# Altium PCB 04-12307_Drone_ESC.PcbDoc (part 2 of 5)
Units mm, origin at the board's own origin, x right, y up, seen from the top; angles counter-clockwise.
Board outline 55 x 33 mm, 4 copper layers (LAYER 1 (Top), LAYER 2, LAYER 3, LAYER 4 (Bottom)), stack 1.504 mm thick; 174 components, 90 nets, 407 pads, 193 vias.
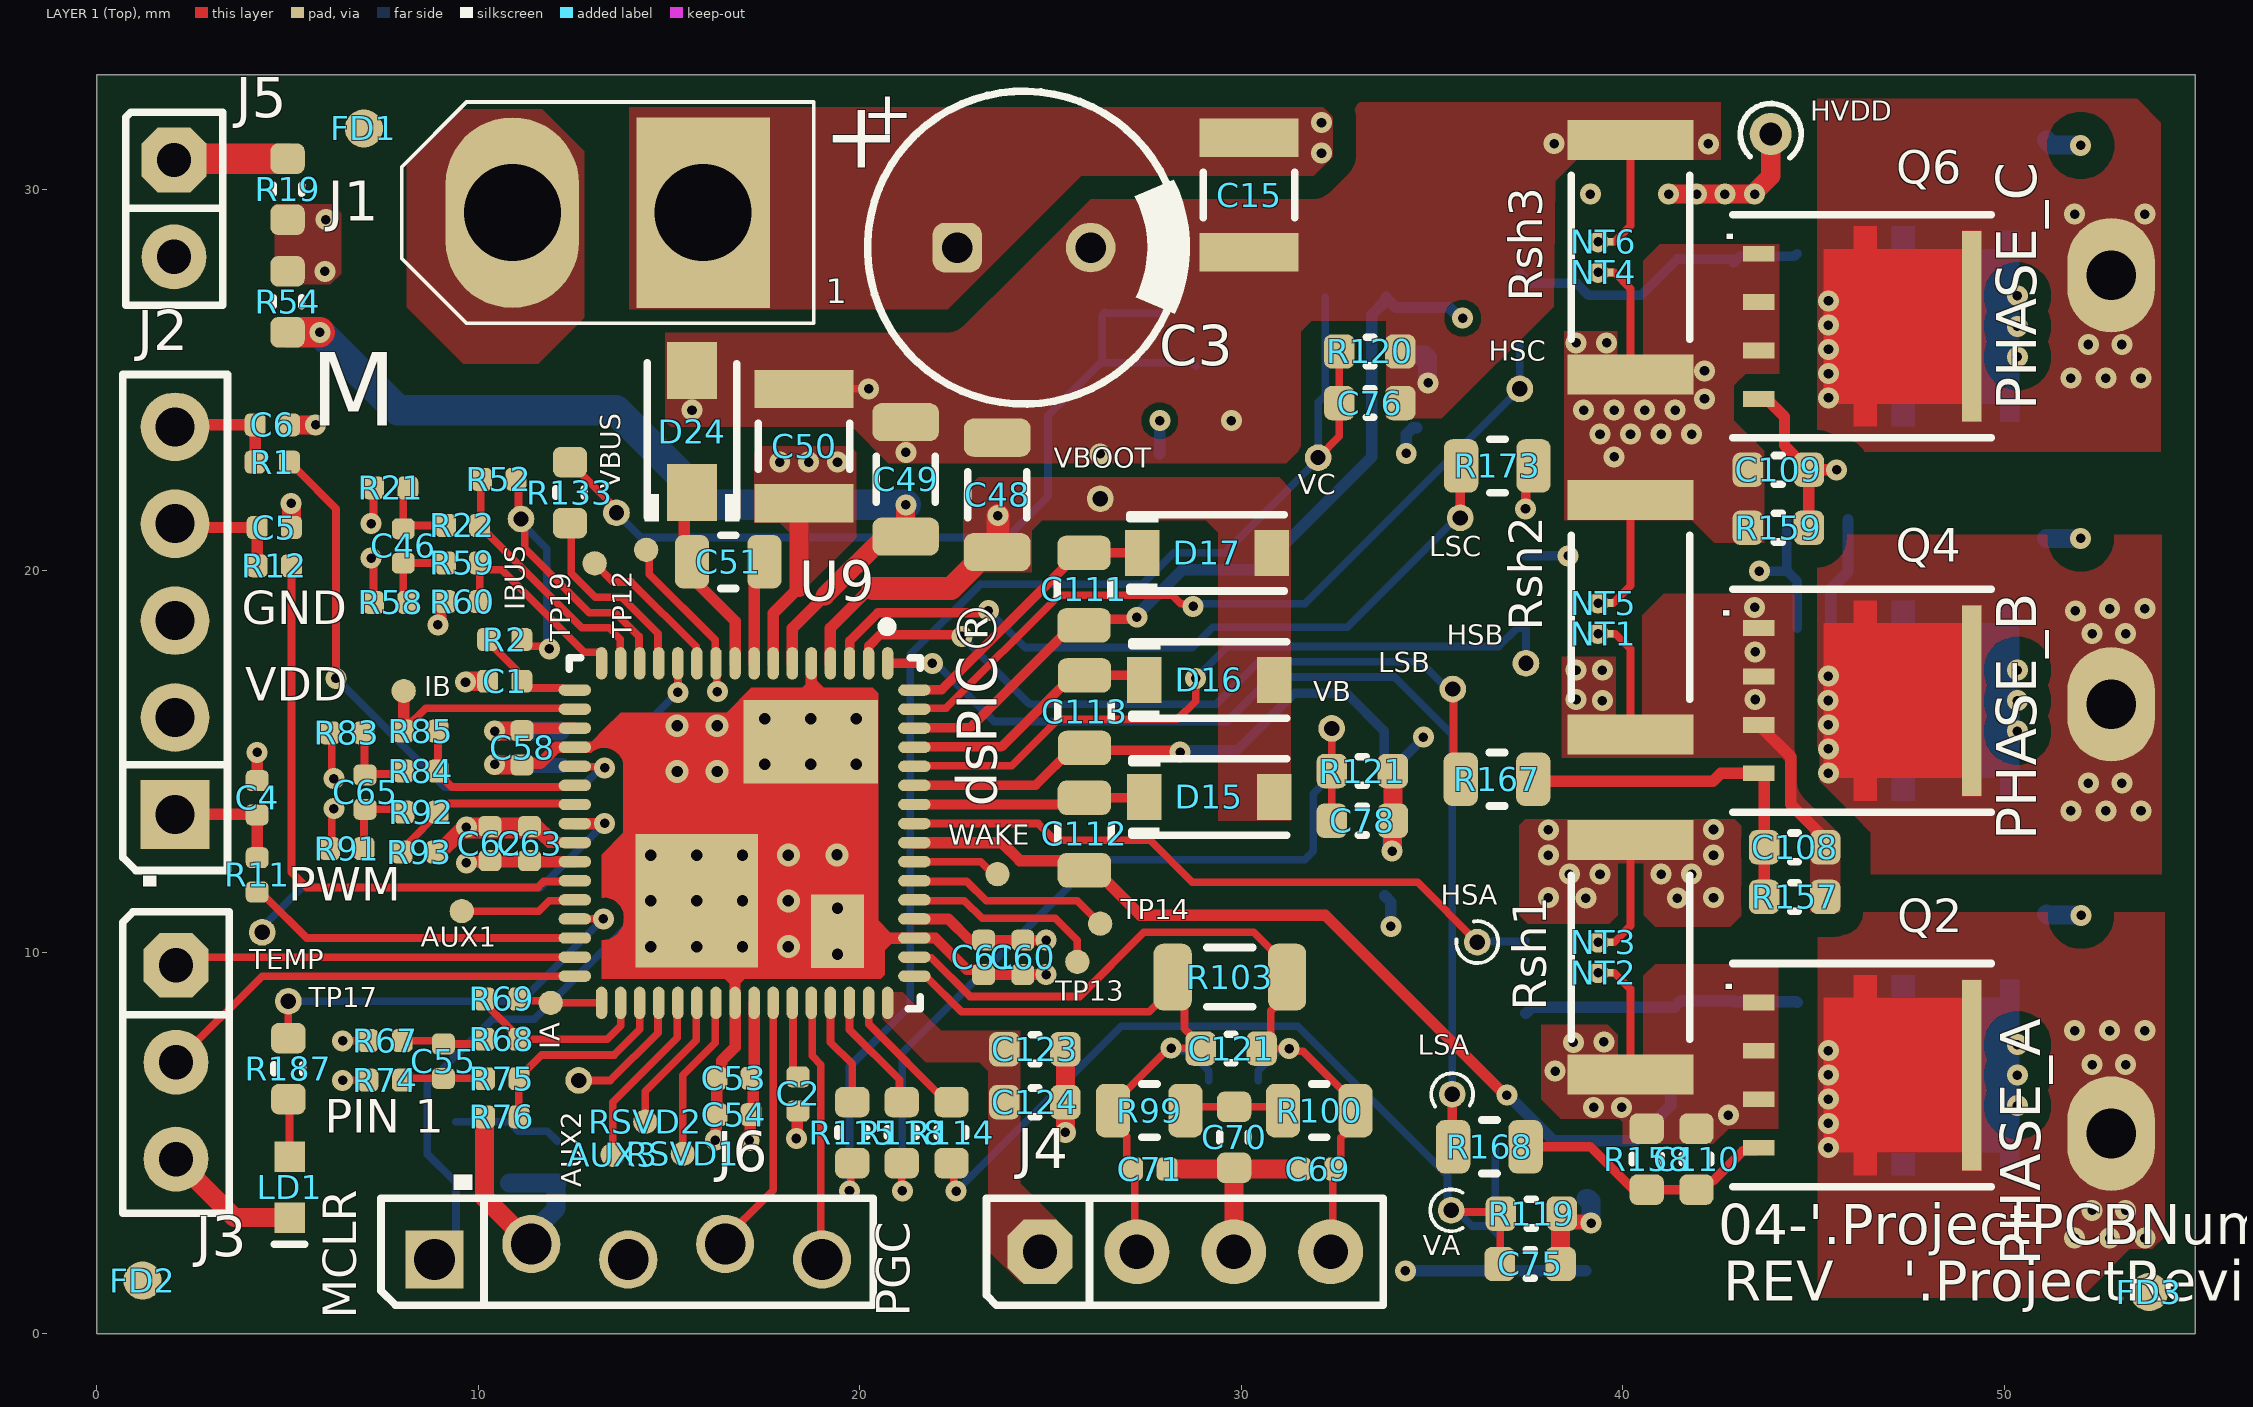
[diagram p0: LAYER 1 (Top) view]

## Part data (continued)
C85: library part CAP0011, "Capacitor", Manufacturer 1="Taiyo Yuden", Manufacturer 2="Wurth Electronics Inc", Manufacturer 3=Samsung, Manufacturer 4=AVX, Manufacturer 5=Murata, Manufacturer 6=Yageo, Manufacturer 8="Murata Electronics North America", Manufacturer Part Number 1=EMK107B7104KA-T, Manufacturer Part Number 2=885012206046, Manufacturer Part Number 3=CL10B104KO8NNNC, Manufacturer Part Number 4=0603YC104KAT2A, Manufacturer Part Number 5=GRM188R71C104KA01D, Manufacturer Part Number 6=CC0603KRX7R7BB104, Manufacturer Part Number 8=GCM188R71C104KA37D, Operating Temperature="-55C to +125C", Package=0603, Supplier Part Number 1=587-1240-1-ND, Temperature Coeffcient=X7R, Tolerance=10%, Voltage=16V, Category=Capacitor, ComponentLink1Description="SVN Datasheet", ComponentLink1URL=https://chn-vm-apps.microchip.com/mchprepo/parts/Datasheets/nmc2.pdf, ComponentLink2Description="Local Datasheet", ComponentLink2URL=C:\ALTIUM_WORK\00001_MCHP-CDB\Datasheets\nmc2.pdf, ComponentLink3Description="Open Symbol", ComponentLink3URL="C:\ALTIUM_WORK\00001_MCHP-CDB\Library\LibraryRefs\Capacitor NP.SchLib", ComponentLink4Description="Open Footprint", ComponentLink4URL=C:\ALTIUM_WORK\00001_MCHP-CDB\Library\Footprints\CAP_C_0603.PcbLib, ComponentLink5Description="Open Footprint 2", ComponentLink6Description="Open Footprint 3", ComponentLink7Description="Open Footprint 4", Description_="CAP CER 0.1uF 16V 10% X7R SMD 0603", Dev Tools Status=Production, Manufacturer 7="Taiyo Yuden", Manufacturer Part Number 7=EMK107B7104KA-T, MCHP-ID=CAP0011, Owner="Cristian Papuc", Populated=YES, Quantity Override=1, Revision=3, Status="MCL Design", Supplier 1=Digi-Key, Supplier 2=Digi-Key, Supplier 3=Digi-Key, Supplier 4=Digi-Key, Supplier 5=Digi-Key, Supplier 6=Digi-Key, Supplier 7=Newark, Supplier 8=Digi-Key, Supplier Part Number 2=732-7965-1-ND, Supplier Part Number 3=1276-1005-1-ND, Supplier Part Number 4=478-1239-1-ND, Supplier Part Number 5=490-1532-1-ND, Supplier Part Number 6=311-1088-1-ND, Supplier Part Number 7=86H5248, Supplier Part Number 8=490-4774-1-ND, Symbol="Capacitor NP", Type=Ceramic
C105 C106 C107 C108 C109 C110: library part CAP0120, Manufacturer 1=KEMET, Manufacturer 2=Panasonic, Manufacturer 4="TDK Corporation", Manufacturer 5="Samsung Electro-Mechanics", Manufacturer 6=Yageo, Manufacturer Part Number 1=C0603C222K5RACTU, Manufacturer Part Number 2=ECJ-1VB1H222K, Manufacturer Part Number 3=ECU-V1H222KBV, Manufacturer Part Number 4=C1608X7R1H222K, Manufacturer Part Number 5=CL10B222KB8NNNC, Manufacturer Part Number 6=CC0603KRX7R9BB222, Operating Temperature="-55C to +125C", Package=0603, Supplier Part Number 1=399-1085-1-ND, Temperature Coefficient=X7R, Tolerance=10%, Voltage=50V, Category=Capacitor, ComponentLink1Description="SVN Datasheet", ComponentLink1URL=https://chn-vm-apps.microchip.com/mchprepo/parts/Datasheets/ECJ__General_.pdf, ComponentLink2Description="Local Datasheet", ComponentLink2URL=C:\ALTIUM_WORK\00001_MCHP-CDB\Datasheets\ECJ__General_.pdf, ComponentLink3Description="Open Symbol", ComponentLink3URL="C:\ALTIUM_WORK\00001_MCHP-CDB\Library\LibraryRefs\Capacitor NP.SchLib", ComponentLink4Description="Open Footprint", ComponentLink4URL=C:\ALTIUM_WORK\00001_MCHP-CDB\Library\Footprints\CAP_C_0603.PcbLib, ComponentLink5Description="Open Footprint 2", ComponentLink6Description="Open Footprint 3", ComponentLink7Description="Open Footprint 4", Description_="CAP CER 2200pF 50V 10% X7R SMD 0603", Dev Tools Status=Production, Manufacturer 3=Panasonic, MCHP-ID=CAP0120, Populated=Yes, Quantity Override=1, Revision=4, Status="MCL Design", Supplier 1=Digi-Key, Supplier 2=Digi-Key, Supplier 3=Digi-Key, Supplier 4=Digi-Key, Supplier 5="Samsung Electro-Mechanics", Supplier 6=Yageo, Supplier Part Number 2=PCC1776TR-ND, Supplier Part Number 3=PCC222BVTR-ND, Supplier Part Number 4=445-1309-1-ND, Supplier Part Number 5=CL10B222KB8NNNC, Supplier Part Number 6=CC0603KRX7R9BB222, Symbol="Capacitor NP", Type=Ceramic
C111 C112 C113: library part CAP0526, "Capacitor", Manufacturer 1=Murata, Manufacturer Part Number 1=GCM21BR71H224KA37L, Operating Temperature="-55C to +125C", Package=0805, Supplier Part Number 1=490-4970-1-ND, Temperature Coeffcient=X7R, Tolerance=10%, Voltage=50V, Category=Capacitor, ComponentLink1Description="SVN Datasheet", ComponentLink1URL=https://chn-vm-apps.microchip.com/mchprepo/parts/Datasheets/S0717E.pdf, ComponentLink2Description="Local Datasheet", ComponentLink2URL=C:\ALTIUM_WORK\00001_MCHP-CDB\Datasheets\S0717E.pdf, ComponentLink3Description="Open Symbol", ComponentLink3URL="C:\ALTIUM_WORK\00001_MCHP-CDB\Library\LibraryRefs\Capacitor NP.SchLib", ComponentLink4Description="Open Footprint", ComponentLink4URL=C:\ALTIUM_WORK\00001_MCHP-CDB\Library\Footprints\CAP_C_0805.PcbLib, ComponentLink5Description="Open Footprint 2", ComponentLink6Description="Open Footprint 3", ComponentLink7Description="Open Footprint 4", Description_="CAP CER 0.22uF 50V 10% X7R SMD 0805", Dev Tools Status=Production, MCHP-ID=CAP0526, Populated=Yes, Quantity Override=1, Revision=1, Status="MCL Design", Supplier 1=Digi-Key, Symbol="Capacitor NP", Type=Ceramic
C121: library part CAP1112, Manufacturer 1=KEMET, Manufacturer Part Number 1=C0603C101J1GACTU, Operating Temperature="-55C to +125C", Package=0603, Supplier Part Number 1=399-7821-1-ND, Temperature Coefficient="C0G, NP0", Tolerance=5%, Voltage=100V, Category=Capacitor, ComponentLink1Description="SVN Datasheet", ComponentLink1URL=https://chn-vm-apps.microchip.com/mchprepo/parts/Datasheets/KEM_C1003_C0G_SMD.pdf, ComponentLink2Description="Local Datasheet", ComponentLink2URL=C:\ALTIUM_WORK\00001_MCHP-CDB\Datasheets\KEM_C1003_C0G_SMD.pdf, ComponentLink3Description="Open Symbol", ComponentLink3URL="C:\ALTIUM_WORK\00001_MCHP-CDB\Library\LibraryRefs\Capacitor NP.SchLib", ComponentLink4Description="Open Footprint", ComponentLink4URL=C:\ALTIUM_WORK\00001_MCHP-CDB\Library\Footprints\CAP_C_0603.PcbLib, ComponentLink5Description="Open Footprint 2", ComponentLink6Description="Open Footprint 3", ComponentLink7Description="Open Footprint 4", Description_="CAP CER 100pF 100V 5% C0G SMD 0603", Dev Tools Status=Production, MCHP-ID=CAP1112, Owner="Mihai T(M91442)", Populated=Yes, Quantity Override=1, Revision=0, Status="MCL Design", Supplier 1=Digi-Key, Supplier 2=Farnell, Supplier Part Number 2=1414602, Symbol="Capacitor NP", Type=Ceramic
C123: library part CAP1060, Manufacturer 1=Yageo, Manufacturer 2="Samsung Electro-Mechanics", Manufacturer Part Number 1=CC0603KRX7R8BB105, Manufacturer Part Number 2=CL10B105KA8NNNC, Operating Temperature="-55C to +125C", Package=0603, Supplier Part Number 1=311-1802-1-ND, Temperature Coefficient=X7R, Tolerance=10%, Voltage=25V, Category=Capacitor, ComponentLink1Description="SVN Datasheet", ComponentLink2Description="Local Datasheet", ComponentLink3Description="Open Symbol", ComponentLink3URL="C:\ALTIUM_WORK\00001_MCHP-CDB\Library\LibraryRefs\Capacitor NP.SchLib", ComponentLink4Description="Open Footprint", ComponentLink4URL=C:\ALTIUM_WORK\00001_MCHP-CDB\Library\Footprints\CAP_C_0603.PcbLib, ComponentLink5Description="Open Footprint 2", ComponentLink6Description="Open Footprint 3", ComponentLink7Description="Open Footprint 4", Description_="CAP CER 1uF 25V 10% X7R SMD 0603", Dev Tools Status=Production, MCHP-ID=CAP1060, Owner="Sompoch Loboonlert", Populated=YES, Quantity Override=1, Restricted Sourcing=No, Revision=1, Status="MCL Design", Supplier 1=Digi-Key, Supplier 2="Samsung Electro-Mechanics", Supplier Part Number 2=CL10B105KA8NNNC, Symbol="Capacitor NP", Type=Ceramic
C124: library part CAP2033, Manufacturer 1=Yageo, Manufacturer Part Number 1=CC0603KRX7R9BB104, Operating Temperature="-55°C ~ 125°C", Package=0603, Supplier Part Number 1=311-1344-1-ND, Temperature Coefficient=X7R, Tolerance=±10%, Voltage=50V, Category=Capacitor, ComponentLink1Description="SVN Datasheet", ComponentLink2Description="Local Datasheet", ComponentLink3Description="Open Symbol", ComponentLink3URL="C:\ALTIUM_WORK\00001_MCHP-CDB\Library\LibraryRefs\Capacitor NP.SchLib", ComponentLink4Description="Open Footprint", ComponentLink4URL=C:\ALTIUM_WORK\00001_MCHP-CDB\Library\Footprints\CAP_C_0603.PcbLib, ComponentLink5Description="Open Footprint 2", ComponentLink6Description="Open Footprint 3", ComponentLink7Description="Open Footprint 4", Description_="CAP CER 0.1uF 50V 10% X7R SMD 0603", Dev Tools Status=Production, MCHP-ID=CAP2033, Owner="Jose Garcia", Populated=YES, Quantity Override=1, Revision=1, Status="MCL Design", Supplier 1=Digi-Key, Symbol="Capacitor NP", Type=Ceramic
D9 D10 D11 D12: library part DIODE1074, Forward Current=200mA, Manufacturer 1="Vishay Semiconductor Diodes Division", Manufacturer Part Number 1=BAS40-04-E3-08, Operating Temperature="-65C to +125C", Package=SOT-23-3, Power=200mW, Reverse Current=100nA, Reverse Voltage=40V, Supplier Part Number 1=BAS40-04-E3-08CT-ND, Category=Diode, ComponentLink1Description="SVN Datasheet", ComponentLink1URL=https://chn-vm-apps.microchip.com/mchprepo/parts/Datasheets/bas40v.pdf, ComponentLink2Description="Local Datasheet", ComponentLink2URL=C:\ALTIUM_WORK\00001_MCHP-CDB\Datasheets\bas40v.pdf, ComponentLink3Description="Open Symbol", ComponentLink3URL="C:\ALTIUM_WORK\00001_MCHP-CDB\Library\LibraryRefs\Diode Schottky DUAL AK.SchLib", ComponentLink4Description="Open Footprint", ComponentLink4URL=C:\ALTIUM_WORK\00001_MCHP-CDB\Library\Footprints\SOT-23-3.PcbLib, ComponentLink5Description="Open Footprint 2", ComponentLink6Description="Open Footprint 3", ComponentLink7Description="Open Footprint 4", Description_="DIO SCTKYARR BAS40-04 1V 200mA 40V SOT-23-3", Dev Tools Status=Production, MCHP-ID=DIODE1074, Owner="Stephen Humberd", Populated=YES, Quantity Override=1, Revision=A, Status="MCL Design", Supplier 1=Digi-Key, Symbol="Diode Schottky DUAL AK", Type="Schottky Array"
D15 D16 D17: library part DIODE1743, Forward Current=1A, Manufacturer 1="Nexperia USA Inc.", Manufacturer Part Number 1=PMEG4010CEH,115, Package=SOD-123, Reverse Current=50µA, Reverse Voltage=40V, Supplier Part Number 1=1727-3846-1-ND, Category=Diode, ComponentLink1Description="SVN Datasheet", ComponentLink1URL=https://chn-vm-apps.microchip.com/mchprepo/parts/Datasheets/PMEG4010CEH_PMEG4010CEJ.pdf, ComponentLink2Description="Local Datasheet", ComponentLink2URL=C:\ALTIUM_WORK\00001_MCHP-CDB\Datasheets\PMEG4010CEH_PMEG4010CEJ.pdf, ComponentLink3Description="Open Symbol", ComponentLink3URL="C:\ALTIUM_WORK\00001_MCHP-CDB\Library\LibraryRefs\Diode Schottky.SchLib", ComponentLink4Description="Open Footprint", ComponentLink4URL=C:\ALTIUM_WORK\00001_MCHP-CDB\Library\Footprints\SOD-123.PcbLib, ComponentLink5Description="Open Footprint 2", ComponentLink6Description="Open Footprint 3", ComponentLink7Description="Open Footprint 4", Description_="DIO SCTKY PMEG4010CEH,115 40V 1A SOD-123F", Dev Tools Status=Design, MCHP-ID=DIODE1743, Owner="Narasimha Murthy", Populated=YES, Quantity Override=1, Revision=1, Status="MCL Design", Supplier 1=Digi-Key, Symbol="Diode Schottky", Type="Schottky Single"
D22: library part DIODE1814, Manufacturer 1="Nexperia USA Inc.", Manufacturer Part Number 1=PESD2CANFD27V-UX, Package=SOT323, Reverse Voltage=27V, Supplier Part Number 1=1727-PESD2CANFD27V-UXCT-ND, Category=Diode, ComponentLink1Description="SVN Datasheet", ComponentLink1URL=https://chn-vm-apps.microchip.com/mchprepo/parts/Datasheets/PESD2CANFD27V-U.pdf, ComponentLink2Description="Local Datasheet", ComponentLink2URL=C:\ALTIUM_WORK\00001_MCHP-CDB\Datasheets\PESD2CANFD27V-U.pdf, ComponentLink3Description="Open Symbol", ComponentLink3URL="C:\ALTIUM_WORK\00001_MCHP-CDB\Library\LibraryRefs\Diode K1K2CC ESD Bidirectional.SchLib", ComponentLink4Description="Open Footprint", ComponentLink4URL=C:\ALTIUM_WORK\00001_MCHP-CDB\Library\Footprints\SOT-323-3.PcbLib, ComponentLink5Description="Open Footprint 2", ComponentLink6Description="Open Footprint 3", ComponentLink7Description="Open Footprint 4", Description_="DIO TVS ARRAY PESD2CANFD27V-UX 27V 1A SOT-323-3", Dev Tools Status=Design, MCHP-ID=DIODE1814, Owner="Narasimha Murthy", Populated=Yes, Quantity Override=1, Revision=1, Status="MCL Design", Supplier 1=Digi-Key, Symbol="Diode K1K2CC ESD Bidirectional", Type="TVS Array"